# Altium PCB PCB.PcbDoc (part 1 of 2)
Units mm, origin at the board's own origin, x right, y up, seen from the top; angles counter-clockwise.
Board outline 96.72 x 126.91 mm, 2 copper layers (Top Layer, Bottom Layer), stack 1.571 mm thick; 115 components, 74 nets, 368 pads, 160 vias.
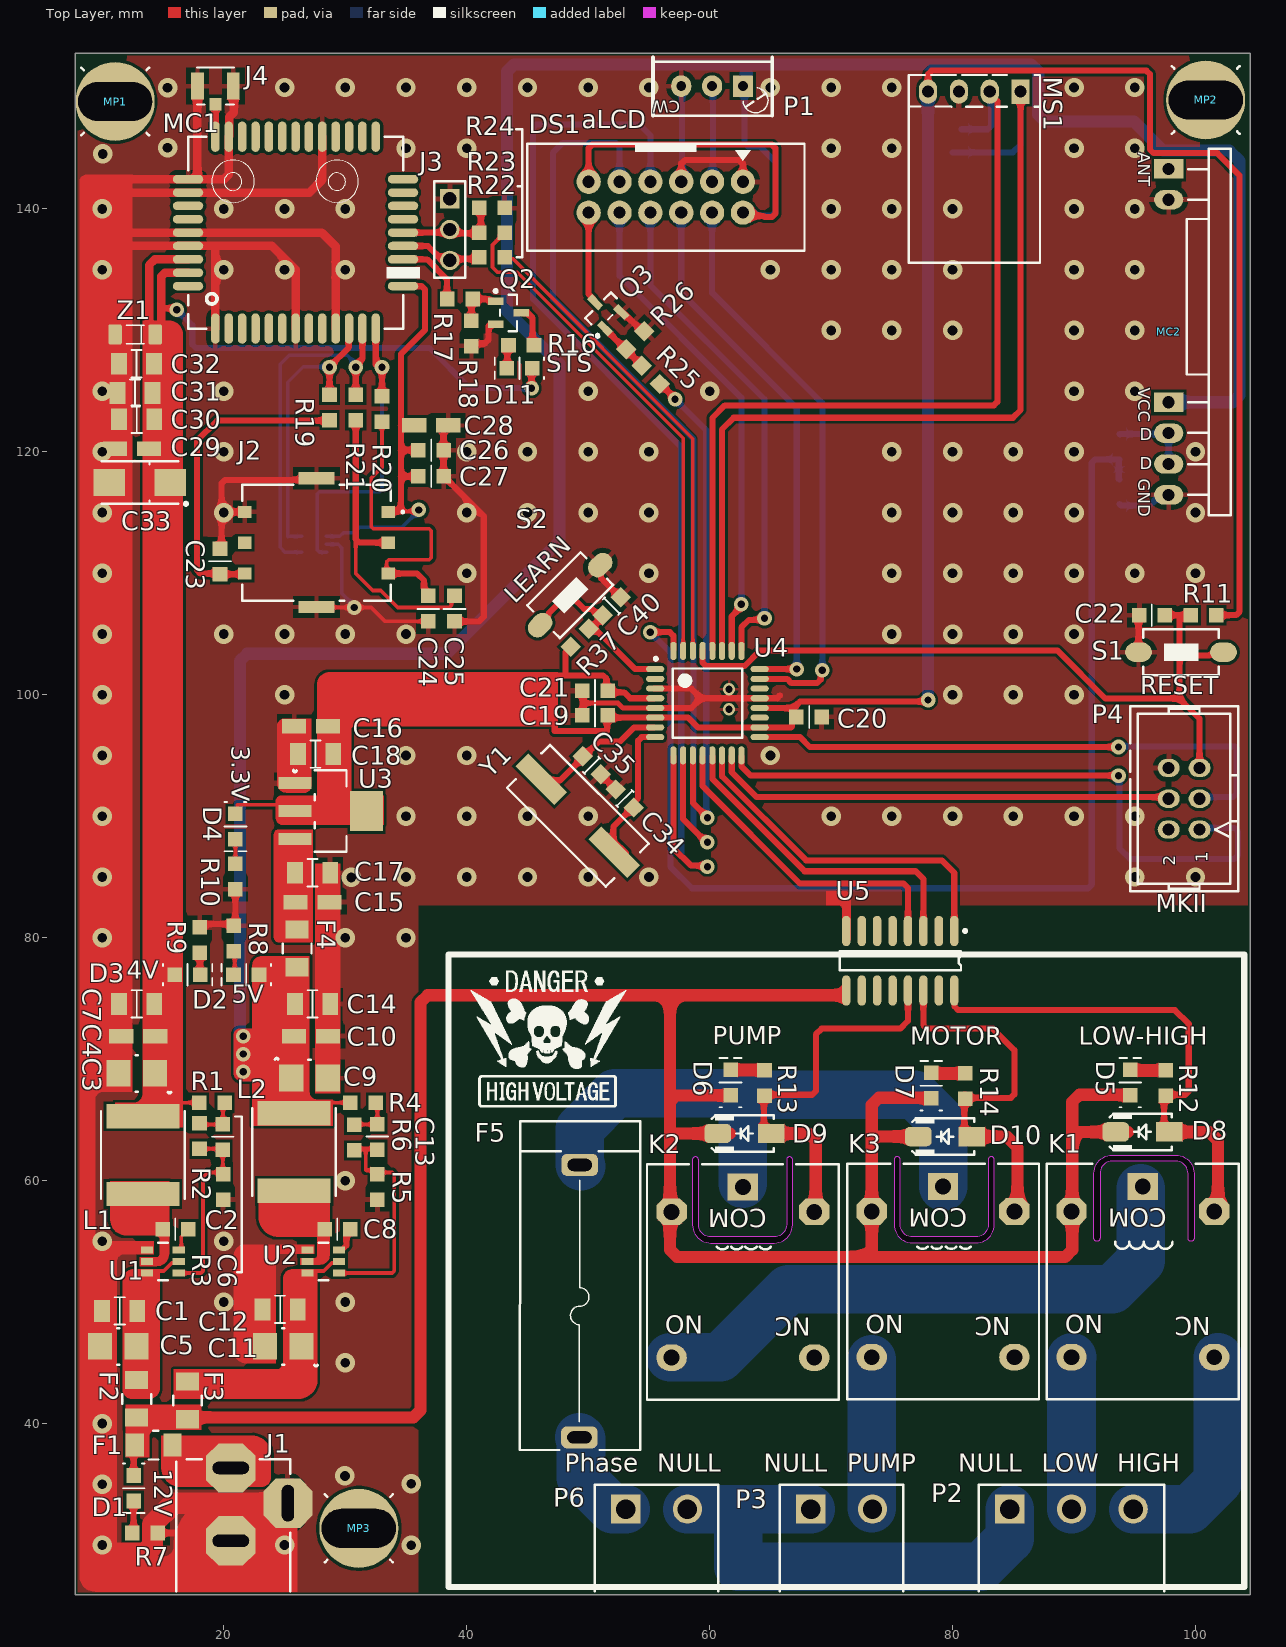
[diagram p0: Top Layer view]
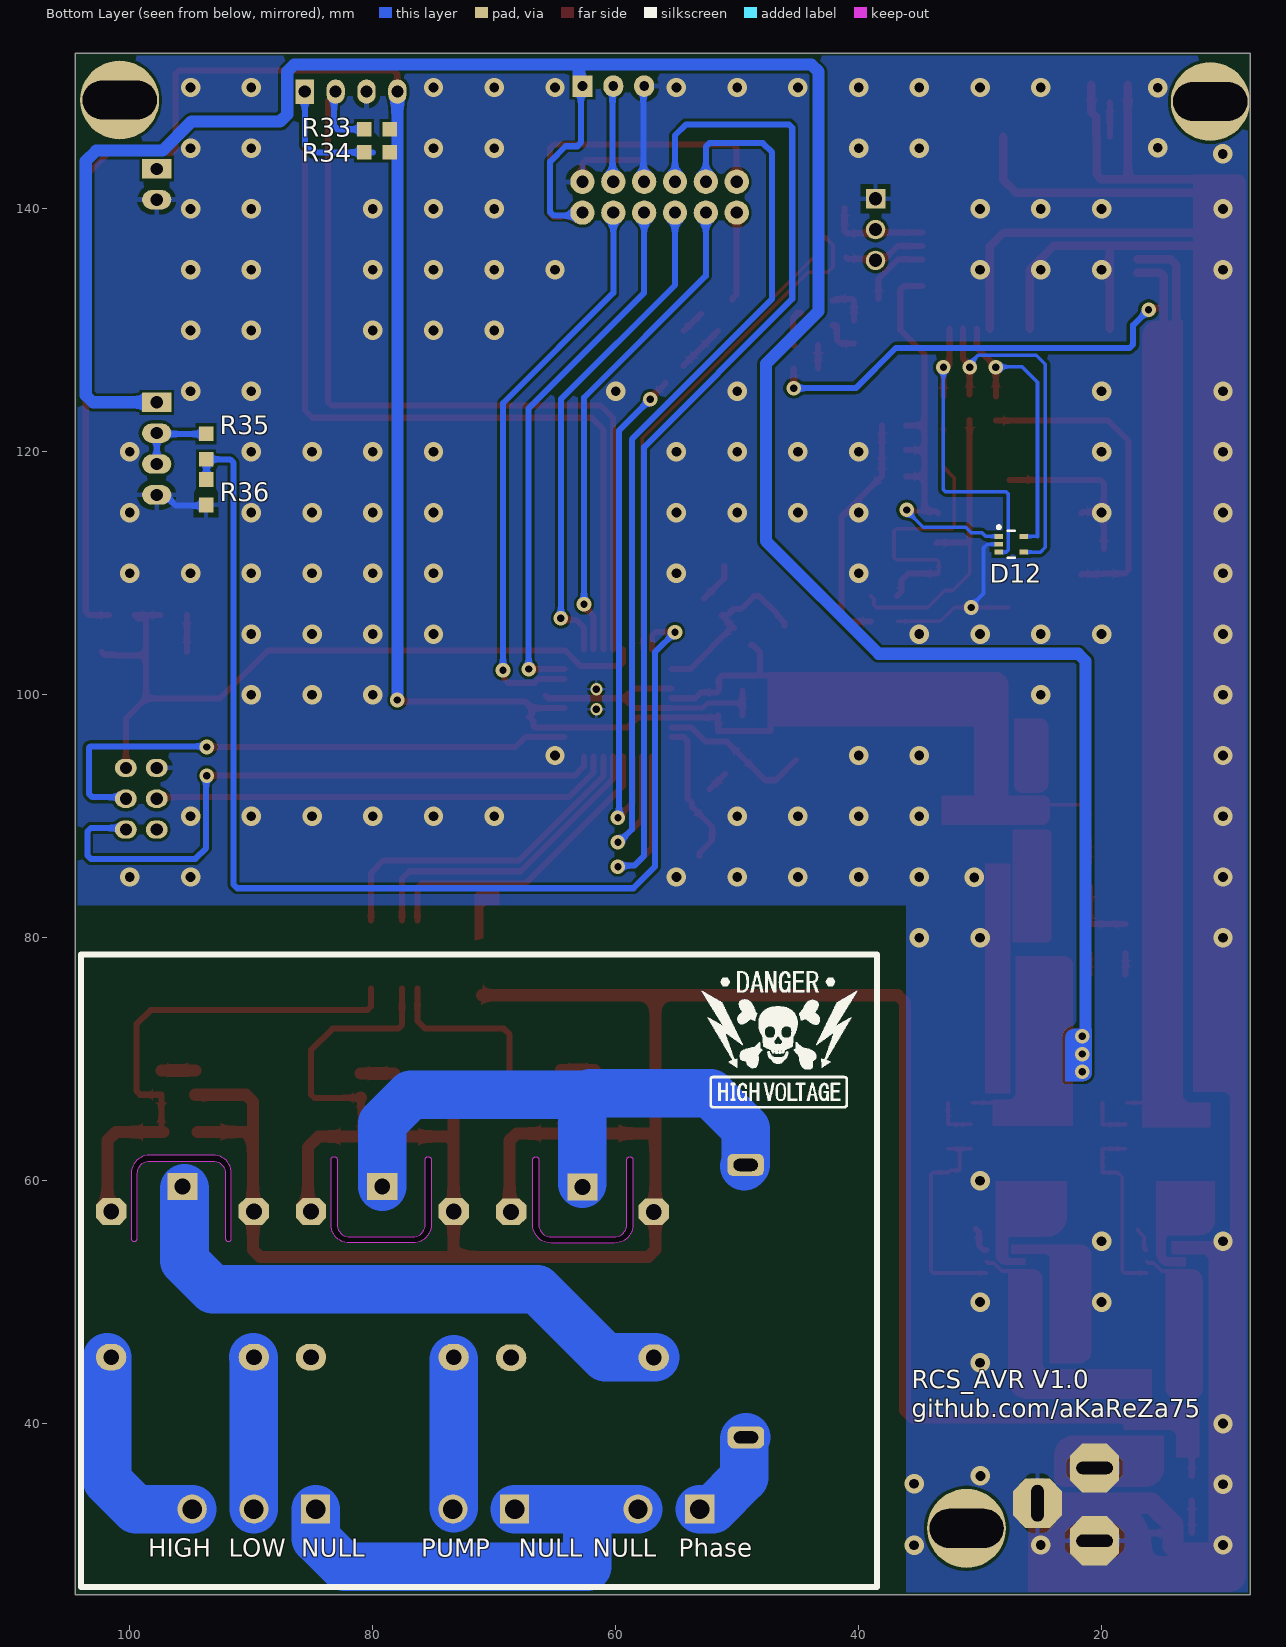
[diagram p1: Bottom Layer view, seen from below]

## Layer stack, top to bottom
Top Solder: solder mask 0.0102, Solder Resist, Dk 3.5
Top Layer: signal copper 0.0356
Dielectric 1: dielectric 1.5, FR-4, Dk 4.8
Bottom Layer: signal copper 0.0356
Bottom Solder: solder mask 0.0102, Solder Resist, Dk 3.5

## Board outline
104.493,25.908 104.493,152.814 101.021,152.814 11.242,152.814 7.77,152.814 7.77,25.908
cut-out: 75.188,56.388 ccw(c76.708,56.388) 76.708,54.868 81.915,54.868 ccw(c81.915,56.388) 83.435,56.388 83.435,61.722 ccw(c83.185,61.722) 82.935,61.722 82.935,56.388 cw(c81.915,56.388) 81.915,55.368 76.708,55.368 cw(c76.708,56.388) 75.688,56.388 75.688,61.722 ccw(c75.438,61.722) 75.188,61.722
cut-out: 58.582,56.38 ccw(c60.102,56.38) 60.102,54.86 65.309,54.86 ccw(c65.309,56.38) 66.829,56.38 66.829,61.714 ccw(c66.579,61.714) 66.329,61.714 66.329,56.38 cw(c65.309,56.38) 65.309,55.36 60.102,55.36 cw(c60.102,56.38) 59.082,56.38 59.082,61.714 ccw(c58.832,61.714) 58.582,61.714
cut-out: 91.636,55.253 91.636,60.587 cw(c93.156,60.587) 93.156,62.107 98.363,62.107 cw(c98.363,60.587) 99.883,60.587 99.883,55.253 cw(c99.633,55.253) 99.383,55.253 99.383,60.587 ccw(c98.363,60.587) 98.363,61.607 93.156,61.607 ccw(c93.156,60.587) 92.136,60.587 92.136,55.253 cw(c91.886,55.253)

## Design rules (kind name [scope] priority, off if disabled: settings)
AcuteAngle [All] p1: minimum=6.00000000000000E+0001 checktracksonly=TRUE
AssemblyTestPointUsage [All] p1 off:
AssemblyTestpoint [All] p1 off: testpointundercomponent=TRUE minsize=1.016 maxsize=2.54 preferedsize=1.524 minholesize=0 maxholesize=1.016 preferedholesize=0.813 testpointgrid=0.025 usegrid=TRUE gridtolerance=0 allowsidetop=TRUE allowsidebottom=TRUE
BoardOutlineClearance [All] p1: gap=0.2 ignorepadtopadclearanceinfootprint=FALSE
Clearance Poly_Clearance [All vs InPolygon] p1: gap=0.25 ignorepadtopadclearanceinfootprint=TRUE except(0.3: Arc-Hole Track-Hole SMDPad-Hole THPad-Hole Via-Hole Fill-Hole Poly-Hole Region-Hole Text-Hole)
Clearance [All] p2: gap=0.2 ignorepadtopadclearanceinfootprint=FALSE except(0.3: Arc-Hole Track-Hole SMDPad-Hole THPad-Hole Via-Hole Fill-Hole Poly-Hole Region-Hole Text-Hole)
FabricationTestPointUsage [All] p1 off: valid=0 allowmultiple=FALSE
FabricationTestpoint [All] p1 off: side=3 testpointundercomponent=TRUE minsize=1.016 maxsize=2.54 preferedsize=1.524 minholesize=0 maxholesize=1.016 preferedholesize=0.813 testpointgrid=0.025 allowsidetop=TRUE allowsidebottom=TRUE usegrid=TRUE gridtolerance=0
HoleSize [All] p1: absolutevalues=TRUE maxlimit=10 minlimit=0.4 maxpercent=80.000 minpercent=20.000
HoleToHoleClearance [All] p1: gap=0.3 allowstackedmicrovias=TRUE
MinimumAnnularRing [All] p1: minimumring=0.15
MinimumSolderMaskSliver [All] p1: minsoldermaskwidth=0.01
PolygonConnect [All] p1: thpad.connectstyle=Relief thpad.reliefconductorwidth=0.4 thpad.reliefentries=4 thpad.polygonreliefangle="90 Angle" thpad.airgapwidth=0.4 smdpad.connectstyle=Relief smdpad.reliefconductorwidth=0.4 smdpad.reliefentries=4 smdpad.polygonreliefangle="90 Angle" smdpad.airgapwidth=0.4 via.connectstyle=Direct via.reliefconductorwidth=0.254 via.reliefentries=4 via.polygonreliefangle="90 Angle" via.airgapwidth=0.254
RoutingVias [All] p1: holewidth=0.4 width=0.7 viastyle="Through Hole" minholewidth=0.4 minwidth=0.7 maxholewidth=3 maxwidth=6
SilkToSilkClearance [All] p1: silktosilkclearance=0
SilkToSolderMaskClearance [IsPad] p1: minsilkscreentomaskgap=0.01 clearancetoexposedcopper=TRUE
SolderMaskExpansion [All] p1: expansion=0.102 istentingtop=FALSE
Width [All] p1: maxlimit=10 minlimit=0.2 preferedwidth=0.3
21 further rules are at their usual default settings.

## Classes and differential pairs
component class Main: MP1 MP2 MP3
component class U_Remote: MC2 R35 R36
component class U_Inputs: D14 D15 P6
component class U_GSM: C23 C24 C25 C26 C27 C28 C29 C30 C31 C32 C33 D11 D12 J2 J3 J4 MC1 Q2 R16 R17 R18 R19 R20 R21 R22 R23 R24 Z1
component class U_aLCD: DS1 P1 Q3 R25 R26
component class U_Supply: C1 C2 C3 C4 C5 C6 C7 C8 C9 C10 C11 C12 C13 C14 C15 C16 C17 C18 D1 D2 D3 D4 F1 F2 F3 F4 J1 L1 L2 R1 R2 R3 R4 R5 R6 R7 R8 R9 R10 U1 U2 U3
component class U_Outputs: D5 D6 D7 D8 D9 D10 F5 K1 K2 K3 P2 P3 R12 R13 R14 U5
component class U_Controller: C19 C20 C21 C22 C34 C35 C40 MS1 P4 R11 R33 R34 R37 S1 S2 U4 Y1

## Components (designator, comment, footprint, x,y, rotation, side; value= is the part's Value field where it differs from the comment)
C1 "100n" "CAP 1206/3216" 11.43,49.276 r180 top
C2 "100n" "CAP 0805/2012" 16.002,56.007 r180 top
C3 "47u" SMT_C_Tantalum_B 12.827,68.834 r180 top
C4 "10u" SMT_C_Tantalum_A 12.954,71.882 r180 top
C5 "10u" SMT_C_Tantalum_B 11.303,46.355 r180 top
C6 "68p" "CAP 0805/2012" 19.901,63.619 r90 top
C7 "100n" "CAP 1206/3216" 12.827,74.549 r180 top
C8 "100n" "CAP 0805/2012" 29.337,56.007 r180 top
C9 "47u" SMT_C_Tantalum_B 27.051,68.453 r0 top
C10 "10u" SMT_C_Tantalum_A 27.178,71.882 r0 top
C11 "10u" SMT_C_Tantalum_B 24.892,46.355 r180 top
C12 "100n" "CAP 1206/3216" 24.638,49.403 r180 top
C13 "68p" "CAP 0805/2012" 32.639,63.627 r90 top
C14 "100n" "CAP 1206/3216" 27.305,74.549 r0 top
C15 "10u" SMT_C_Tantalum_A 27.305,82.931 r0 top
C16 "22u" SMT_C_Tantalum_A 27.178,97.409 r180 top
C17 "100n" "CAP 1206/3216" 27.305,85.344 r0 top
C18 "100n" "CAP 1206/3216" 27.559,95.123 r180 top
C19 "100n" "CAP 0805/2012" 50.546,98.298 r180 top
C20 "100n" "CAP 0805/2012" 68.199,98.171 r0 top
C21 "100n" "CAP 0805/2012" 50.546,100.33 r180 top
C22 "100n" "CAP 0805/2012" 96.393,106.553 r180 top
C23 "33p" "CAP 0805/2012" 19.685,110.998 r90 top
C24 "33p" "CAP 0805/2012" 36.83,107.061 r270 top
C25 "33p" "CAP 0805/2012" 38.989,107.061 r270 top
C26 "100n" "CAP 0805/2012" 37.084,120.142 r0 top
C27 "33p" "CAP 0805/2012" 37.084,117.983 r0 top
C28 "1u" SMT_C_Tantalum_A 37.084,122.174 r0 top
C29 "1u" SMT_C_Tantalum_A 12.446,120.269 r180 top
C30 "100n" "CAP 1206/3216" 12.827,122.682 r180 top
C31 "10p" "CAP 1206/3216" 12.684,124.841 r180 top
C32 "33p" "CAP 1206/3216" 12.811,127.254 r180 top
C33 "100u" SMT_C_Tantalum_C 13.081,117.475 r180 top
C34 "22p" "CAP 0805/2012" 52.996,91.477 r135 top
C35 "22p" "CAP 0805/2012" 50.302,94.171 r315 top
C40 "100n" "CAP 0805/2012" 51.943,107.315 r45 top
D1 "Yellow" "LED 0805/2012 YELLOW" 12.573,34.671 r270 top
D2 "Red" "LED 0805/2012 RED" 21.844,76.962 r180 top
D3 "Blue" "LED 0805/2012 BLUE" 17.018,76.962 r0 top
D4 "Green" "LED 0805/2012 GREEN" 20.955,89.146 r270 top
D5 "Green" "LED 0805/2012 GREEN" 94.615,68.072 r90 top
D6 "Green" "LED 0805/2012 GREEN" 61.722,68.072 r90 top
D7 "Green" "LED 0805/2012 GREEN" 78.232,67.818 r90 top
D8 "1N5819" 430X270D 95.631,64.008 r180 top
D9 "1N5819" 430X270D 62.865,63.881 r180 top
D10 "1N5819" 430X270D 79.375,63.627 r180 top
D11 "Blue" "LED 0805/2012 BLUE" 44.339,126.873 r180 top
D12 "SMF-05" SC70-5_N 27.432,112.395 r180 bottom
DS1 "16x2" BOX-HDR-2x6-2.54mm-S 62.738,142.24 r180 top
F1 "3A" 1206_F 14.224,38.227 r180 top
F2 "2A" 1206_F 12.827,42.037 r90 top
F3 "1A" 1206_F 17.018,41.91 r90 top
F4 "0.5A" 1206_F 26.035,79.121 r90 top
F5 "5A" FUSE_BLX_20x5 59.69,50.8 r90 top
J1 "Female" "Power Jack BIG" 20.574,21.844 r90 top
J2 "6'Pin" GCT_SIM8051_Plastik 27.628,112.522 r90 top
J3 "3" HDR_THT_3M_2.54mm 38.608,138.303 r270 top
J4 "U.FL" IPEX-3x3mm 19.304,150.114 r270 top
K1 "12V" "Relay 18.85x15.35x15.70" 95.664,52.491 r180 top
K2 "12V" "Relay 18.85x15.35x15.70" 62.738,52.451 r180 top
K3 "12V" "Relay 18.85x15.35x15.70" 79.215,52.491 r180 top
L1 "10u" L_7 13.335,62.103 r90 top
L2 "10u" L_7 25.781,62.357 r90 top
MC1 "M66" m66 25.908,138.049 r90 top
MC2 "RXB22" RF_ETRXB 97.79,120.269 r270 top
MP1 "M3" SCREW-M3 11.049,148.844 r0 top
MP2 "M3" SCREW-M3 100.838,148.971 r0 top
MP3 "M3" SCREW-M3 31.115,31.369 r0 top
MS1 "AHT20" AHT20 81.661,149.606 r180 top
P1 "10K" "Multi turn 01" 62.738,150.114 r270 top
P2 "Value?" Phoenix_3PIN_RA_P5.08mm 89.789,28.956 r0 top
P3 "2'Pin" Phoenix_2PIN_RA_P5.08mm 70.866,28.956 r0 top
P4 "3x2" IDC_2X3 99.06,91.44 r90 top
P6 "2'Pin" Phoenix_2PIN_RA_P5.08mm 55.626,28.956 r0 top
Q2 "NPN" SOT23_N 43.434,131.445 r0 top
Q3 "NPN" SOT23_N 51.308,131.572 r135 top
R1 "49.9b" "RES 0805 (2012X06L)" 18.161,66.421 r0 top
R2 "17.8K" "RES 0805 (2012X06L)" 19.939,60.32 r270 top
R3 "100K" "RES 0805 (2012X06L)" 17.996,64.519 r270 top
R4 "49.9b" "RES 0805 (2012X06L)" 30.623,66.421 r0 top
R5 "13.7K" "RES 0805 (2012X06L)" 32.639,60.325 r270 top
R6 "100K" "RES 0805 (2012X06L)" 30.734,64.389 r270 top
R7 "1.8k" "RES 0805 (2012X06L)" 14.351,30.988 r180 top value=1.8K
R8 "680b" "RES 0805 (2012X06L)" 20.828,80.772 r270 top
R9 "100b" "RES 0805 (2012X06L)" 18.034,80.645 r270 top
R10 "220b" "RES 0805 (2012X06L)" 20.955,84.193 r90 top
R11 "10K" "RES 0805 (2012X06L)" 99.822,106.553 r0 top
R12 "1.8K" "RES 0805 (2012X06L)" 97.536,67.188 r90 top
R13 "1.8K" "RES 0805 (2012X06L)" 64.516,67.188 r90 top
R14 "1.8K" "RES 0805 (2012X06L)" 81.026,66.934 r90 top
R16 "100b" "RES 0805 (2012X06L)" 45.339,128.778 r180 top
R17 "4.7K" "RES 0805 (2012X06L)" 38.608,132.588 r0 top
R18 "47K" "RES 0805 (2012X06L)" 40.386,128.91 r90 top
R19 "22b" "RES 0805 (2012X06L)" 28.702,122.814 r90 top
R20 "22b" "RES 0805 (2012X06L)" 33.02,122.687 r90 top
R21 "22b" "RES 0805 (2012X06L)" 30.861,122.809 r90 top
R22 "1K" "RES 0805 (2012X06L)" 42.921,136.017 r180 top
R23 "1K" "RES 0805 (2012X06L)" 42.926,138.049 r180 top
R24 "5.6K" "RES 0805 (2012X06L)" 42.926,140.081 r180 top
R25 "4.7K" "RES 0805 (2012X06L)" 55.753,125.73 r135 top
R26 "47K" "RES 0805 (2012X06L)" 54.483,129.794 r225 top
R33 "4.7K" "RES 0805 (2012X06L)" 80.518,146.558 r180 bottom
R34 "4.7K" "RES 0805 (2012X06L)" 80.513,144.653 r180 bottom
R35 "1K" "RES 0805 (2012X06L)" 93.726,121.285 r270 bottom
R36 "1.8K" "RES 0805 (2012X06L)" 93.726,115.824 r90 bottom
R37 "10K" "RES 0805 (2012X06L)" 49.911,105.283 r225 top
S1 "PB" SW_PB_SMD_2PIN_SPST_6X3X2 98.806,103.505 r0 top
S2 "PB" SW_PB_SMD_2PIN_SPST_6X3X2 48.514,108.204 r225 top
U1 "Value?" TPS54302 14.986,53.34 r270 top
U2 "Value?" TPS54302 28.194,53.34 r270 top
U3 "3.3V" SOT223_M 28.8,90.424 r0 top
U4 "ATmega328P" ATMEGA328 59.817,99.314 r0 top
U5 "ULN2003" SO16_M 75.692,78.105 r270 top
Y1 "12M" "Crystal SMD" 49.149,90.043 r135 top
Z1 "5.1V" "SOD80, LL-34" 12.699,129.667 r180 top

## Footprints (in the part's own frame and the unit in brackets; to place one, negate y for a bottom-side part, rotate by r counter-clockwise, add the part's x,y. Pads: shape width x height; smd on the part's side, far side on the other; paste and mask are expansions set on the pad)
430X270D [mm] "SMA Molded Diode, 2-Leads, Body 4.3x2.7mm"
  rect 2.2x1.6 smd: 1(-2.2,0)
  rrect50% 2.2x1.6 smd: 2(2.2,0)
  silkscreen extent -2.4,-1.5 2.7,1.5, body extent -3.57,-1.77 3.58,1.78, height 2.4
1206_F [mm] "Surface mount FUSE 1206"
  rect 1.5x1.9 smd: 1(-1.55,0) 2(1.55,0)
  silkscreen extent -0.4,-1.18 0.4,1.18, body extent -2.46,-1.28 2.46,1.28, height 0.71
AHT20 [mm]
  rect 1.5x2 hole 1: 1(-3.937,-0.051)
  oval 1.5x2 hole 1: 2(-1.397,-0.051) 3(1.143,-0.051) 4(3.683,-0.051)
  silkscreen extent -5.54,-1.42 5.28,14.05, body extent -5.64,-1.52 5.38,14.15, height 1.27
ATMEGA328 [mm] "Thin QFP, 32-Leads, Body 7x7mm, Pitch 0.8mm, IPC Low Density"
  oval 1.5x0.5 smd: 1(-4.301,2.8) 2(-4.301,2) 3(-4.301,1.2) 4(-4.301,0.4) 5(-4.301,-0.4) 6(-4.301,-1.2) 7(-4.301,-2) 8(-4.301,-2.8) 17(4.301,-2.8) 18(4.301,-2) 19(4.301,-1.2) 20(4.301,-0.4) 21(4.301,0.4) 22(4.301,1.2) 23(4.301,2) 24(4.301,2.8)
  oval 0.5x1.5 smd: 9(-2.8,-4.301) 10(-2,-4.301) 11(-1.2,-4.301) 12(-0.4,-4.301) 13(0.4,-4.301) 14(1.2,-4.301) 15(2,-4.301) 16(2.8,-4.301) 25(2.8,4.301) 26(2,4.301) 27(1.2,4.301) 28(0.4,4.301) 29(-0.4,4.301) 30(-1.2,4.301) 31(-2,4.301) 32(-2.8,4.301)
  silkscreen extent -4.37,-2.85 2.85,3.77, body extent -5.75,-5.75 5.75,5.75, height 1.2
BOX-HDR-2x6-2.54mm-S [mm] "Male Box Header Connector 2X6 Pitch 2.54mm"
  round 2 hole 1: 1(0,0) 2(0,2.54) 3(2.54,0) 4(2.54,2.54) 5(5.08,0) 6(5.08,2.54) 7(7.62,0) 8(7.62,2.54) 9(10.16,0) 10(10.16,2.54) 11(12.7,0) 12(12.7,2.54)
  silkscreen extent -5.07,-3.13 17.77,5.67, body extent -5.17,-3.23 17.87,5.77, height 9
"CAP 0805/2012" [mm] "Chip Capacitor, 2-Leads, Body 2.00x1.20mm, IPC Medium Density"
  rect 1.2x1.2 smd: 1(-1.075,0) 2(1.025,0)
  silkscreen extent 0,-0.9 0,0.9, body extent -1.88,-0.97 1.83,0.98, height 1.15
"CAP 1206/3216" [mm] "Chip Capacitor, 2-Leads, Body 3.25x1.60mm, IPC Medium Density"
  rect 1.3x1.8 smd: 1(-1.45,0) 2(1.45,0)
  silkscreen extent -0.42,-1.12 0.42,1.12, body extent -2.37,-1.2 2.38,1.2, height 1.6
"Crystal SMD" [mm] "DESIGNER ABBAS BASEREH"
  rect 4.5x1.5 smd: 1(-4.25,0) 2(4.25,0)
  silkscreen extent -5.75,-2.5 5.75,2.5, body extent -6.9,-2.8 6.9,2.8, height 4
FUSE_BLX_20x5 [mm]
  rrect50% 1.8x3 hole 1 slot 2 at 90 deg: 1(-11.938,10.414) 2(10.49,10.389)
  silkscreen extent -12.98,5.41 14.1,15.32, body extent -13.08,5.31 14.2,15.42, height 1.27
GCT_SIM8051_Plastik [mm]
  rect 1x1.1 smd: 1(2.54,-5.9) 2(0,-5.9) 3(-2.54,-5.9) 4(-2.54,5.9) 5(2.54,5.9) 6(0,5.9)
  rect 1x3 smd: 5(-5.3,0) 5(5.3,0)
  silkscreen extent -4.77,-7.2 4.77,6.1, body extent -6.07,-12.87 6.08,6.73, height 1.35
HDR_THT_3M_2.54mm [mm] "Pin Header, pitch 2.54 mm, THT, Vertical, single row, 3p"
  rect 1.6x1.6 hole 1.1: 1(-2.54,0)
  round 1.6 hole 1.1: 2(0,0) 3(2.54,0)
  silkscreen extent -3.96,-1.27 3.96,1.27, body extent -4.21,-1.52 4.21,1.52, height 8.54
IDC_2X3 [mm] "IDC2X3 FOR PROGPIN AND JUMPER BOX AND ETC. DESIGNER ABBAS BASEREH"
  oval 1.5x1.8 hole 1 mask+0.1: 1(-2.54,-1.27) 2(-2.54,1.27) 3(0,-1.27) 4(0,1.27) 5(2.54,-1.27) 6(2.54,1.27)
  silkscreen extent -7.62,-4.45 7.62,4.45, body extent -7.87,-4.67 7.88,4.68, height 7.62
IPEX-3x3mm [mm] "U.FL-R-SMT"
  rect 1.05x1 smd: 1(1.5,0)
  rect 2.2x1.05 smd mask+0.102: 2(0,-1.475)
  rect 2.2x1.05 smd: 3(0,1.475)
  silkscreen extent -1.52,-1.52 1.52,1.52, body extent -1.7,-2.21 2.23,2.21, height 1.25
L_7 [mm] "INDUCTOR, 7.2X6.9mm, 7.1X6.5mm, SPM6530"
  rect 2x6 smd: 1(-3.2,0) 2(3.2,0)
  silkscreen extent -3.6,-3.45 3.6,3.45, body extent -4.3,-3.55 4.3,3.55, height 4.5
"LED 0805/2012 BLUE" [mm] "Chip Diode, 2-Leads, Body 2.00x1.25mm, IPC Medium Density"
  rect 1.2x1.2 smd: 1(-1.05,0) 2(1.05,0)
  silkscreen extent -2.03,-0.9 2.03,0.9, body extent -2.11,-0.97 2.11,0.98, height 0.7
"LED 0805/2012 GREEN" [mm] "Chip Diode, 2-Leads, Body 2.00x1.25mm, IPC Medium Density"
  rect 1.2x1.2 smd: 1(-1.05,0) 2(1.05,0)
  silkscreen extent -2.03,-0.9 2.03,0.9, body extent -2.11,-0.97 2.11,0.98, height 0.7
"LED 0805/2012 RED" [mm] "Chip Diode, 2-Leads, Body 2.00x1.25mm, IPC Medium Density"
  rect 1.2x1.2 smd: 1(-1.05,0) 2(1.05,0)
  silkscreen extent -2.03,-0.9 2.03,0.9, body extent -2.11,-0.97 2.11,0.98, height 0.7
"LED 0805/2012 YELLOW" [mm] "Chip Diode, 2-Leads, Body 2.00x1.25mm, IPC Medium Density"
  rect 1.2x1.2 smd: 1(-1.05,0) 2(1.05,0)
  silkscreen extent -2.03,-0.9 2.03,0.9, body extent -2.11,-0.97 2.11,0.98, height 0.7
m66 [mm]
  oval 2.5x0.7 smd: 1(-7.9,6.6) 2(-7.9,5.5) 3(-7.9,4.4) 4(-7.9,3.3) 5(-7.9,2.2) 6(-7.9,1.1) 7(-7.9,0) 8(-7.9,-1.1) 9(-7.9,-2.2) 10(-7.9,-3.3) 11(-7.9,-4.4) 12(-7.9,-5.5) 13(-7.9,-6.6) 23(7.9,-6.6) 24(7.9,-5.5) 25(7.9,-4.4) 26(7.9,-3.3) 27(7.9,-2.2) 28(7.9,-1.1) 29(7.9,0) 30(7.9,1.1) 31(7.9,2.2) 32(7.9,3.3) 33(7.9,4.4) 34(7.9,5.5) 35(7.9,6.6)
  oval 0.7x2.5 smd: 14(-4.4,-8.85) 16(-2.2,-8.85) 17(-1.1,-8.85) 18(0,-8.85) 19(1.1,-8.85) 20(2.2,-8.85) 21(3.3,-8.85) 22(4.4,-8.85) 36(4.4,8.85) 37(3.3,8.85) 38(2.2,8.85) 39(1.1,8.85) 40(0,8.85) 41(-1.1,8.85) 42(-2.2,8.85) 43(-3.3,8.85) 44(-4.4,8.85)
  silkscreen extent -7.9,-10.21 7.9,8.85, body extent -9.25,-10.21 9.25,10.2, height 1.27
"Multi turn 01" [mil] "Stand Multi Turn - Turning CW Increase P1~2 Resistor"
  rect 70x65 hole 31.5: 1(0,0)
  oval 70x65 hole 31.5: 2(0,-100) 3(0,-200)
  silkscreen extent -93,-291 96,94, body extent -98,-297 102,100, height 472
Phoenix_2PIN_RA_P5.08mm [mm] "Phoenix 2 Pin; Pitch 5.08mm; Body 1016X1200"
  rect 2.4x2.4 hole 1.6: 1(-2.54,4)
  round 2.4 hole 1.6: 2(2.54,4)
  silkscreen extent -5.08,-2.75 5.08,6, body extent -5.3,-6.22 5.31,6.23, height 8.5
Phoenix_3PIN_RA_P5.08mm [mm] "Phoenix 3 Pin; Pitch 5.08mm; Body 1524X1200"
  rect 2.4x2.4 hole 1.6: 1(-5.08,4)
  round 2.4 hole 1.6: 2(0,4) 3(5.08,4)
  silkscreen extent -7.62,-2.75 7.62,6, body extent -7.84,-6.22 7.85,6.23, height 8.5
"Power Jack BIG" [mm] "Power Adaptor Jack"
  oct 4.05x4.05 hole 1 slot 3 at 90 deg: 1(14.5,0) 2(8.5,0)
  oct 4.05x4.05 hole 1 slot 3 at 0 deg: 3(11.6,-4.7)
  Top Layer region: 13.125,-5.7 13.625,-5.2 13.625,-4.2 13.125,-3.7 10.075,-3.7 9.575,-4.2 9.575,-5.2 10.075,-5.7
  Top Layer region: 7.5,-1.525 8,-2.025 9,-2.025 9.5,-1.525 9.5,1.525 9,2.025 8,2.025 7.5,1.525
  Top Layer region: 13.5,-1.525 14,-2.025 15,-2.025 15.5,-1.525 15.5,1.525 15,2.025 14,2.025 13.5,1.525
  Bottom Layer region: 13.125,-5.7 13.625,-5.2 13.625,-4.2 13.125,-3.7 10.075,-3.7 9.575,-4.2 9.575,-5.2 10.075,-5.7
  Bottom Layer region: 7.5,-1.525 8,-2.025 9,-2.025 9.5,-1.525 9.5,1.525 9,2.025 8,2.025 7.5,1.525
  Bottom Layer region: 13.5,-1.525 14,-2.025 15,-2.025 15.5,-1.525 15.5,1.525 15,2.025 14,2.025 13.5,1.525
  silkscreen extent 4.36,-4.9 15.2,4.5, body extent 4.26,-5.8 15.6,4.6, height 1.27
"Relay 18.85x15.35x15.70" [mm] "DESIGNER ABBAS BASEREH"
  rect 2.5x2.2 hole 1.3: 1(0,-7.025)
  oval 2.5x2.2 hole 1.3: 2(-5.875,7.025) 3(5.875,7.025)
  oct 2.5x2.2 hole 1.3: 4(-5.875,-4.975) 5(5.875,-4.975)
  silkscreen extent -7.9,-8.9 7.9,10.5, body extent -8.05,-9.05 8.05,10.65, height 15.7
"RES 0805 (2012X06L)" [mm] "Chip Resistor, 2-Leads, Body 2.0x1.3mm, IPC High Density _ (0.100 W)"
  rect 1.2x1.2 smd: 1(-0.2,0) 2(1.9,0)
  body extent -0.9,-0.8 2.6,0.8, height 0.65
RF_ETRXB [mm] "Module RF, Receiver, ET-RXB-12, ET-RXB-22"
  rect 1.6x2.4 hole 1: 1(-23.03,0) 3(-3.81,0)
  oval 1.6x2.4 hole 1: 2(-20.49,0) 4(-1.27,0) 5(1.27,0) 6(3.81,0)
  silkscreen extent -24.7,1.5 5.5,5.1, body extent -24.8,-1.3 5.6,5.2, height 1.27
SC70-5_N [mm]
  rect 0.7x0.4 smd: 1(-1.025,0.65) 2(-1.025,0) 3(-1.025,-0.65) 4(1.025,-0.65) 5(1.025,0.65)
  silkscreen extent -1.15,-1.1 0.27,1.52, body extent -1.67,-1.4 1.68,1.65, height 1.27
SCREW-M3 [mm]
  round 6.5 hole 3.2 slot 6.096 at 0 deg: 1(0,0)
  silkscreen extent -2.79,-2.79 2.79,2.79, body extent -3.35,-3.35 3.35,3.35, height 1.2
SMT_C_Tantalum_A [mm] "Capacitor, SM Tantalum; Body 3.2 x 1.6 mm (LxW typ)"
  rect 2x1.2 smd: 1(-1.4,0) 2(1.4,0)
  body extent -2.59,-1.07 2.59,1.07, height 1.8
SMT_C_Tantalum_B [mm] "Capacitor, SM Tantalum; Body 3.5 x 2.8 mm (LxW typ)"
  rect 2x2.2 smd: 1(-1.5,0) 2(1.5,0)
  silkscreen extent -2.82,-1.5 0.1,1.63, body extent -2.95,-1.7 2.72,1.75, height 2.1
SMT_C_Tantalum_C [mm] "Capacitor, SM Tantalum; Body 6.0 x 3.2 mm (LxW typ)"
  rect 2.6x2.2 smd: 1(-2.5,0) 2(2.5,0)
  silkscreen extent -3.93,-1.75 3.15,1.87, body extent -4.05,-1.95 3.99,2, height 2.8
SO16_M [mm] "16-Pin Small Outline Integrated Circuit 1.27 mm Pitch, IPC Low Density - DESIGNER ABBAS BASEREH"
  oval 2.5x0.7 smd: 1(-2.45,4.445) 2(-2.45,3.175) 3(-2.45,1.905) 4(-2.45,0.635) 5(-2.45,-0.635) 6(-2.45,-1.905) 7(-2.45,-3.175) 8(-2.45,-4.445) 9(2.45,-4.445) 10(2.45,-3.175) 11(2.45,-1.905) 12(2.45,-0.635) 13(2.45,0.635) 14(2.45,1.905) 15(2.45,3.175) 16(2.45,4.445)
  silkscreen extent -2.57,-5 0.8,5.47, body extent -4.25,-5.55 4.25,5.6, height 1.75
"SOD80, LL-34" [mm] "Diode, MiniMELF"
  round 0.5 on Mech15: 0(0,0)
  rrect25% 1.1x1.65 smd: 1(1.65,0) 2(-1.65,0)
  silkscreen extent -0.74,-0.76 0.74,0.76, body extent -2.51,-1.16 2.51,1.16, height 1.6
SOT23_N [mm] "SOT23, 3-Leads, Body 2.9x1.3mm, Pitch 0.95mm, Lead Span 2.3mm, IPC Medium Density"
  rect 1.3x0.6 smd: 1(-1.05,0.95) 2(-1.05,-0.95) 3(1.05,0)
  silkscreen extent -1.17,-1.5 0.7,1.92, body extent -2,-1.8 2,2.05, height 1.1
SOT223_M [mm] "SOT223, 4-Leads, Body 6.5x3.5mm, Pitch 2.3mm, Lead Span 7mm, IPC Low Density"
  rect 2.7x1 smd: 1(-2.95,2.3) 2(-2.95,0) 3(-2.95,-2.3)
  rect 2.7x3.3 smd: 4(2.95,0)
  silkscreen extent -3.07,-3.35 1.3,3.37, body extent -4.85,-3.9 4.85,3.9, height 1.7
SW_PB_SMD_2PIN_SPST_6X3X2 [mm] "SWITCH, PUSHBUTTON, SMD, SPST, 6X3.5X2.5mm, RS-282G05A3, SKQYPA, 50000 Cycles"
  oval 2.2x1.6 smd mask+0.1: 1(-3.5,0) 2(3.5,0)
  silkscreen extent -3.1,-1.9 3.1,1.9, body extent -4.7,-2 4.7,2, height 5
TPS54302 [mm] "SOT-457/SC-74; 6 Leads; Body 3 x 3 mm, inc. leads (LxW max)"
  rect 0.55x1 smd: 1(-0.95,-1.3) 2(0,-1.3) 3(0.95,-1.3) 4(0.95,1.3) 5(0,1.3) 6(-0.95,1.3)
  silkscreen extent -1.55,-0.4 1.55,0.4, body extent -1.7,-1.9 1.7,1.9, height 1.45

## Part data
C1 C7 C12 C14 C17 C18 C30: library part Cap_Multi_SMD_100nF_1206, "Bipolar ceramic capacitor SMD", Package=1206, Rating=50V, Inflow=inflow?, Type=MultiLayer
  C1 C7 C12 C14 C17 C18: Validation=Valid
C2 C8 C19 C20 C21 C22 C26 C40: library part Cap_Multi_SMD_100nF_0805, "Bipolar ceramic capacitor SMD", Package=0805, Rating=50V, Inflow=inflow?, Type=MultiLayer
  C2 C8 C19 C20 C21 C22 C40: Validation=Valid
C3 C4 C9 C10 C15 C16: library part Cap_Tantalum, "Tantalum Capacitor,TAJ Series-SMD", Package=Package?, Rating=6.3v, Inflow=inflow?, Type=Tantalum, Validation=Valid
C5 C11: library part Cap_Tantalum, "Tantalum Capacitor,TAJ Series-SMD", Package=Package?, Rating=25v, Inflow=inflow?, Type=Tantalum, Validation=Valid
C6 C13 C23 C24 C25 C27 C34 C35: library part Cap_Multi_SMD_0805, "Bipolar ceramic capacitor SMD", Package=0805, Rating=Rating?, Inflow=inflow?, Type=MultiLayer
  C6 C13 C34 C35: Validation=Valid
C28 C29: library part Cap_Tantalum, "Tantalum Capacitor,TAJ Series-SMD", Package=SMD-A, Rating=6.3V, Inflow=inflow?, Type=Tantalum
C31 C32: library part Cap_Multi_SMD_1206, "Bipolar ceramic capacitor SMD", Package=1206, Rating=50V, Inflow=inflow?, Type=MultiLayer
C33: library part Cap_Tantalum, "Tantalum Capacitor,TAJ Series-SMD", Package=SMD-C, Rating=6.3V, Inflow=inflow?, Type=Tantalum
D1 D2 D3 D4 D5 D6 D7 D11: library part Semi_LED_SMD, "LED", Package=Package?, Rating=Rating?, Inflow=inflow?, Type=LED, Validation=Valid
D8 D9 D10: library part Semi_Diod_Sch_1N5819_SMD, "Schottky Rectifiers", Package=SMA, Rating=Rating?, Inflow=inflow?, Type=Schottky, Validation=Valid
D12: library part Semi_Diod_TVS_SMF05, "TVS Diode Array", Package=SC70-5, Rating=Rating?, Inflow=inflow?, Type=TVS, Validation=Valid
DS1: library part ModSen_LCD_CH_16x2_Box, "Alphanumeric LCD character", Package=Dip, Rating=Rating?, Inflow=8116, Type=Alphanumeric, Validation=Valid
F1 F2 F3 F4: library part Other_Elec_Fuse_SMD, "Short circiut  protection", Package=1206, Rating=Rating?, Inflow=inflow?, Type=Fast, Validation=Valid
F5: library part Other_Elec_Fuse_THT, "Short circiut  protection", Package=Package?, Rating=Rating?, Inflow=inflow?, Type=Type?, Validation=Valid
J1: library part Con_Power_Jack, "Power Jack", Package=Package?, Rating=Rating?, Inflow=6127, Type=Type?, Validation=Valid
J2: library part Con_Socket_SimCard_1, "Nano SimCard Holder 6P", Package=SMD, Rating=Rating?, Inflow=inflow?, Type=Nano, Validation=Valid
J3: library part Con_MPH_3x1_V_THT_2.54, "Header, single row, 3 pin", Package=Package?, Rating=Rating?, Inflow=7152, Type=Type?, Validation=NT
J4: library part Con_RF_U.FL, Package=SMD, Rating=Rating?, Inflow=inflow?, Type=RF
K1 K2 K3: library part SW_Relay_SPDT, "SPDT Relay", Package=Dip, Rating=Rating?, Inflow=inflow?, Type=SPDT, Validation=Valid
L1 L2: library part Ind_SMD, "Inductor", Package=Package?, Rating=3.8A, Inflow=inflow?, Type=Type?, Validation=Valid
MC1: library part ModSen_Com_M66, "Quectel GSM/GPRS Module", Package=Dip, Rating=Rating?, Inflow=inflow?, Type=GSM-GPRS, Validation=Valid
MC2: library part ModSen_Com_RXB22_433, "JMR RXB22 433MHz ASK superheterodyne wireless receiving module", Package=Dip, Rating=433M, Inflow=8251, Type=Learning, Validation=NT
MP1 MP2 MP3: library part Other_Mech_Screw, "Board Screw With Spacer", Package=Package?, Rating=Rating?, Inflow=8243, Type=Screw, Validation=Valid
MS1: library part ModSen_AHT20, "Air Temperature and Humidity Sensor", Package=Dip, Rating=Rating?, Inflow=inflow?, Type="Air T&H", Validation=NT
P1: library part Res_Multi, "Multi Turn", Package=Package?, Rating=Rating?, Inflow=inflow?, Type=Type?, Validation=Valid
P2: library part Con_Power_3, "Power Connector 3'Pin", Package=Dip, Rating=3b, Inflow=inflow?, Type=Type?, Validation=Valid
P3 P6: library part Con_Power_2, "Power Connector 2'Pin", Package=Package?, Rating=Rating?, Inflow=inflow?, Type=Type?, Validation=NT
P4: library part Con_Prog_MKII_ISP, "6 Pin Standard ISP Header For MKII", Package=Package?, Rating=Rating?, Inflow=inflow?, Type=Type?, Validation=NT
Q2 Q3: library part Semi_BJT_BC817, "NPN General purpose Transistor", Package=Package?, Rating=Rating?, Inflow=inflow?, Type=Type?, Validation=Valid
R1 R2 R3 R4 R5 R6 R7 R8 R9 R10 R11 R12 R13 R14 R16 R17 R18 R19 R20 R21 R22 R23 R24 R25 R26 R33 R34 R35 R36 R37: library part Res_SMD_0805, "Resistor", Package=0805, Rating=0.125W, Inflow=inflow?
  R1 R2 R3 R4 R5 R6: Type=1%, Validation=Valid
  R7 R8 R9 R10 R11 R12 R13 R14 R25 R26 R33 R34 R35 R36 R37: Type=10%, Validation=Valid
  R16 R17 R18 R19 R20 R21 R22 R23 R24: Type=10%
S1 S2: library part SW_PushButton_2_SMD, "SMT Tactile ‎Switch", Package=SMD, Rating=2b, Inflow=8260, Type=Vertical, Validation=Valid
U1 U2: library part IC_Reg_TPS54302, "3'A Synchronous Step-Down Converter", Package=SOT-23-6, Rating=S, Inflow=inflow?, Type=Switching, Validation=Valid
U3: library part IC_Reg_AMS1117_3.3, "1'A Positive voltage regulator", Package=SOT223, Rating=1A, Inflow=5217, Type=LDO, Validation=Valid
U4: library part IC_MCU_ATmega328P_SMD, "8-Bit AVR Microcontroller with 32K Bytes of In-System Programmable Flash Memory", Package=Package?, Rating=Rating?, Inflow=inflow?, Type=Type?, Validation=Valid
U5: library part IC_Driver_ULN2003, "Seven darlington array drivers", Package=SO-16, Rating=Rating?, Inflow=1506, Type=Driver, Validation=Valid
Y1: library part Other_Elec_Xtal_SMD, "Crystal Oscillator", Package=SMD, Rating=Rating?, Inflow=inflow?, Type=Quartz, Validation=Valid
Z1: library part Semi_Diod_Zener_SMD, "Zener Diode", Package=SOD-80, Rating=0.5W, Inflow=inflow?, Type=Zener

## Via types
v1: diameter 1.6, hole 0.8, Top Layer to Bottom Layer, tented both sides, 136 vias
v2: diameter 1.2, hole 0.6, Top Layer to Bottom Layer, 22 vias
v3: diameter 1, hole 0.6, Top Layer to Bottom Layer, 2 vias

## Nets (pads, with @x,y where several pads share a name; then routed paths per layer and width w, separated by ;. In a path a pad name is that pad's centre, name@x,y a point inside that pad or via, vN(x,y) a via of type N, cw(c..) or ccw(c..) an arc to the next point about the centre after c; other vN are vias at no path point)
+3.3: C16.1 C18.1 C19.1 C20.1 C21.1 D4.1 MS1.4 R11.2 R33.2 R34.2 R37.2 U3.2 U3.4 U4.4 U4.6 U4.18 U4.20 | length 178.2
  Top Layer w0.3: D4.1@20.955,90.146 21.131,90.322 21.131,90.932 25.146,90.932
  Top Layer w0.5: 46.215,101.6 51.216,101.6 51.509,101.307 51.509,100.367 C21.1@51.546,100.33 ; 47.244,97.79 47.244,97.028 51.562,97.028 C19.1@51.562,98.282 ; 48.128,101.727 48.128,103.5 R37.2@48.567,103.939 48.719,104.091 R37.2@48.869,104.091 ; C19.1@51.546,98.298 51.562,98.298 C19.1@51.562,98.282 ; C21.1@51.673,100.203 52.959,100.203 53.448,99.714 U4.4@55.417,99.714 ; U4.20@64.217,98.914 66.91,98.914 ; v2@77.978,99.441 67.437,99.441 66.91,98.914 ; MS1.4@77.978,149.657 77.978,151.091 78.271,151.384 95.957,151.384 96.25,151.091 96.25,144.886 96.543,144.594 101.786,144.594 103.632,142.748 103.632,106.846 103.339,106.553 R11.2@101.722,106.553 ; C19.1@51.562,98.282 51.73,98.114 58.223,98.114 59.023,97.314 64.217,97.314 66.696,97.314 66.774,97.392 66.774,97.821 C20.1@67.124,98.171 66.91,98.384 66.91,98.914
  Bottom Layer w1: v2(77.978,99.568) 77.978,144.653 MS1.4@77.978,149.657
+4: C3.1 C4.1 C7.1 C29.1 C30.1 C31.1 C32.1 C33.1 D3.1 D11.1 L1.2 MC1.42 MC1.43 R1.1 Z1.2 | length 56.6
  Top Layer w0.3: C3.1@14.327,68.834 14.327,68.818 15.351,68.818 16.287,67.882 ; 16.129,66.548 16.129,66.421 R1.1@17.923,66.421
  Top Layer w0.5: Z1.2@13.843,130.105 14.154,129.794 14.313,129.794 14.852,130.333 14.852,130.63 14.859,130.637 ; 14.859,131.953 14.979,131.833 15.995,131.833 v2(16.129,131.699) ; v2(45.336,125.246) 45.339,125.249 D11.1@45.339,126.873
  Top Layer w0.7: Z1.2@13.843,130.105 13.843,135.382 14.31,135.849 MC1.42@17.058,135.849 ; 14.859,130.637 14.859,131.953 14.859,134.456 15.152,134.749 MC1.43@17.058,134.749
  Bottom Layer w0.5: v2(16.129,131.699) 17.399,130.429 17.399,128.843 17.692,128.55 36.931,128.55 40.235,125.246 v2(45.336,125.246)
+5: C9.1 C10.1 C14.1 D2.1 DS1.2 DS1.11 F4.1 L2.2 MC2.3 P1.1 R4.1 | length 242.9
  Top Layer w0.3: L2.2@25.908,65.43 25.908,66.421 R4.1@30.623,66.421
  Top Layer w0.5: DS1.11@50.038,142.24 50.038,144.995 50.331,145.288 65.112,145.288 65.405,144.995 65.405,139.612 65.112,139.319 64.525,139.319 64.431,139.413 63.025,139.413 DS1.2@62.738,139.7
  Bottom Layer w0.5: DS1.2@62.738,139.7 62.992,139.446 65.112,139.446 65.405,139.739 65.405,143.891 64.135,145.161 63.158,145.161 62.865,145.454 P1.1@62.865,149.987
  Bottom Layer w1: 21.336,71.12 21.336,71.882 21.336,102.792 21.922,103.378 38.354,103.378 47.625,112.649 47.625,127.254 43.307,131.572 43.307,151.306 43.893,151.892 63.246,151.892 ; P1.1@62.738,150.114 63.021,150.397 63.021,151.667 63.246,151.892 ; 64.47,151.892 63.246,151.892 ; 64.516,151.892 86.462,151.892 87.048,151.306 87.048,147.779 87.634,147.193 94.928,147.193 97.322,144.799 102.773,144.799 103.632,143.94 103.632,124.665 103.046,124.079 MC2.3@97.79,124.079
  other v2: 21.59,68.961 21.59,70.421 21.59,71.882